# Altium PCB BUNE.PcbDoc (part 1 of 2)
Units mm, origin at the board's own origin, x right, y up, seen from the top; angles counter-clockwise.
Board outline 148 x 105 mm, 2 copper layers (Top Layer, Bottom Layer); 139 components, 96 nets, 476 pads, 94 vias.
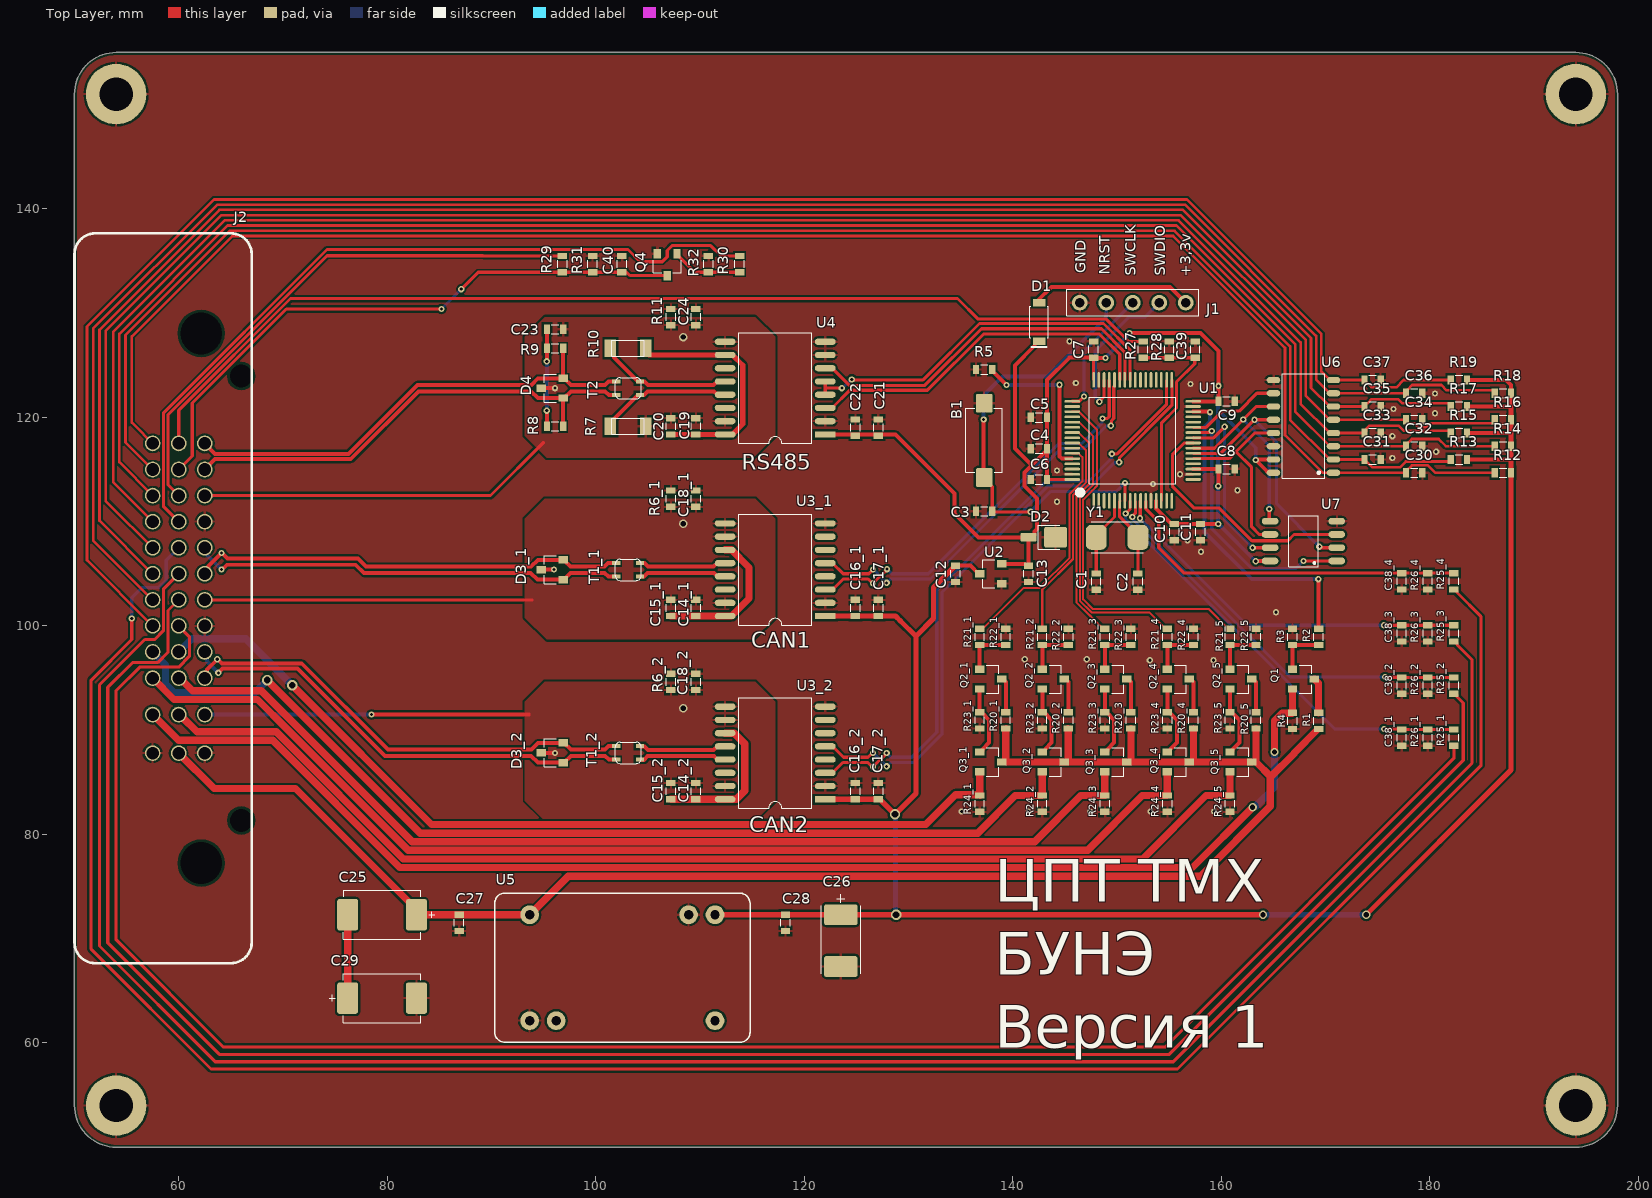
[diagram p0: Top Layer view]
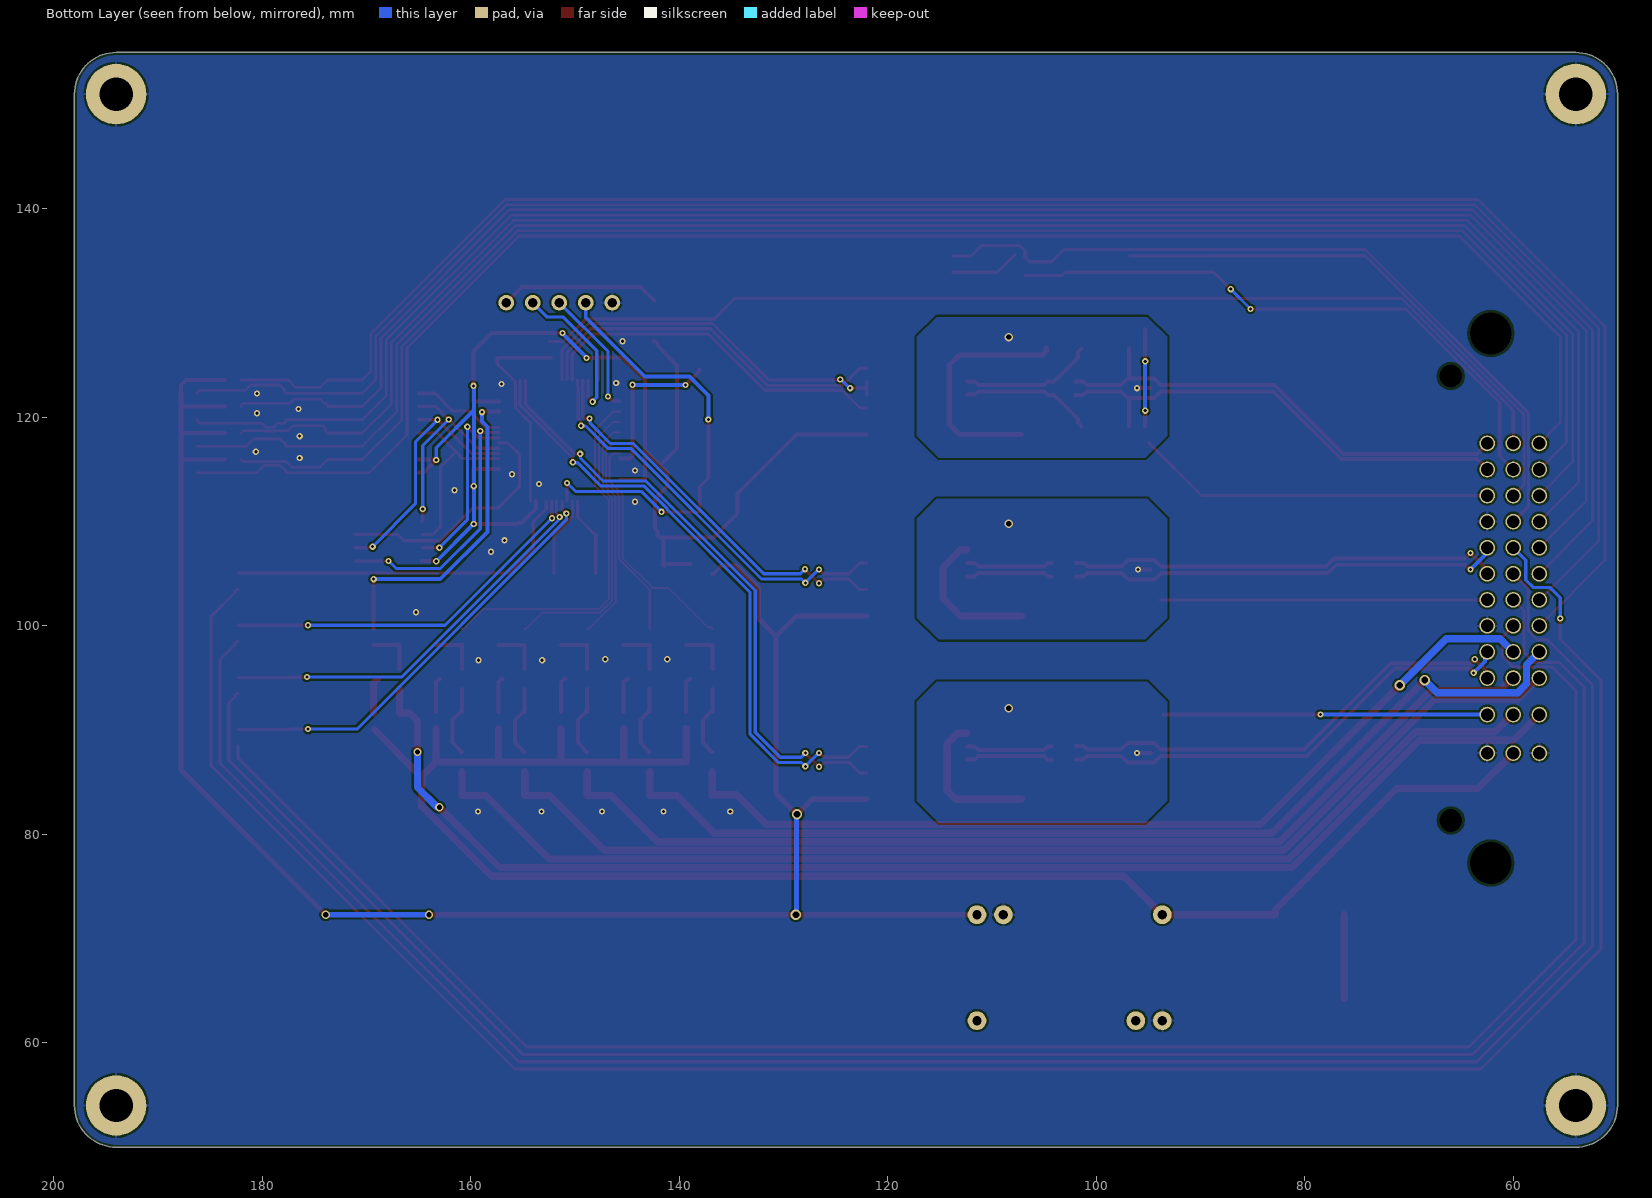
[diagram p1: Bottom Layer view, seen from below]
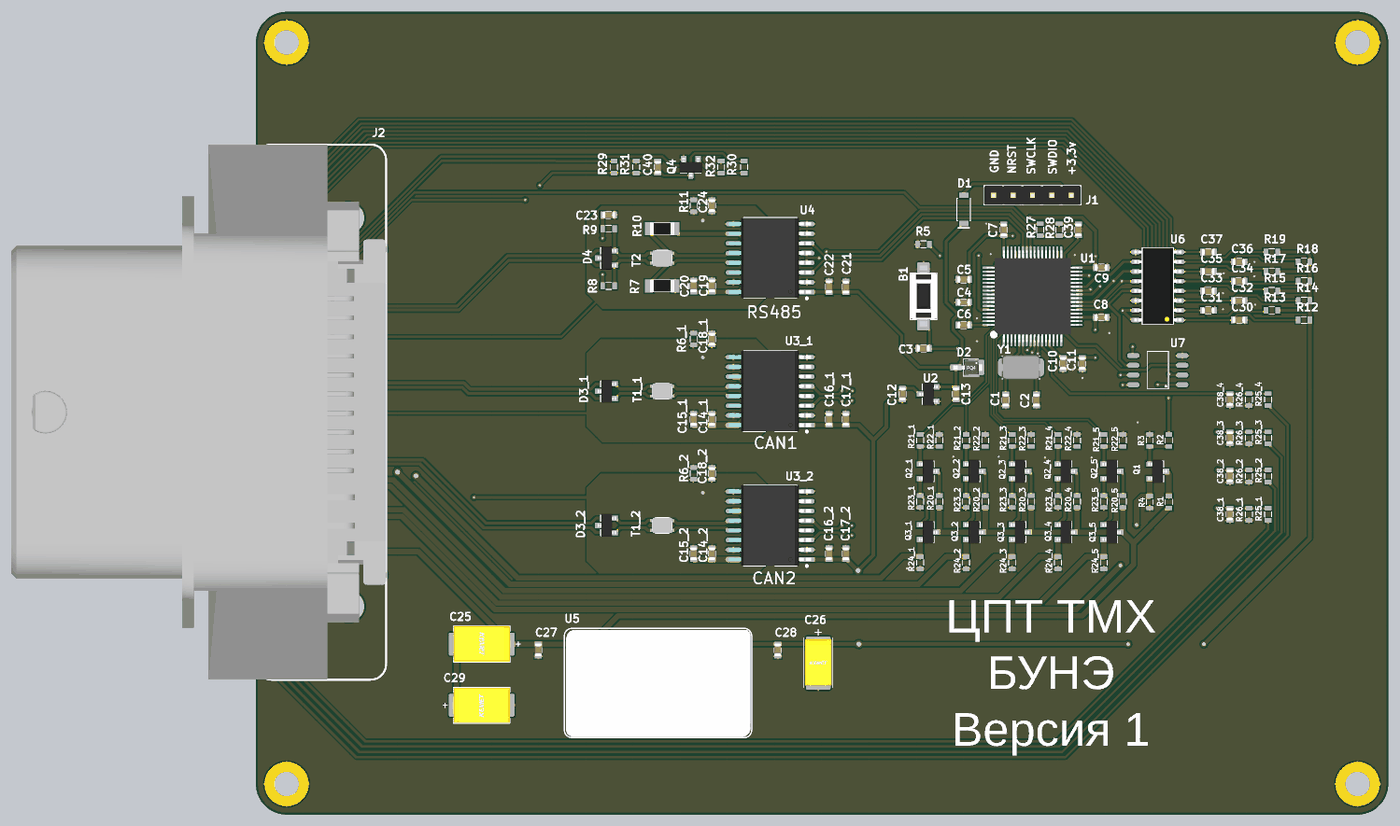
[diagram p3: 3D render of the assembled board from above, using the file's embedded part models]

## Layer stack, top to bottom
Top Solder: solder mask 0.0102, Solder Resist, Dk 3.5
Top Layer: signal copper 0.0356
Dielectric 1: dielectric 0.32, FR-4, Dk 4.8
Bottom Layer: signal copper 0.0356
Bottom Solder: solder mask 0.0102, Solder Resist, Dk 3.5

## Board outline
50,54 50,151 cw(c54,151) 54,155 194,155 cw(c194,151) 198,151 198,54 cw(c194,54) 194,50 54,50 cw(c54,54)

## Design rules (kind name [scope] priority, off if disabled: settings)
AcuteAngle [All] p1: minimum=3.50000000000000E+0001 checktracksonly=FALSE
BoardOutlineClearance "BoardOutlineClearance 1" [All] p1: gap=0.25 ignorepadtopadclearanceinfootprint=FALSE except(0: Arc-SplitContinuation Track-SplitContinuation SMDPad-SplitContinuation THPad-SplitContinuation Via-SplitContinuation Fill-SplitContinuation Poly-SplitContinuation Region-SplitContinuation Text-SplitContinuation) // Milling
Clearance "Clearance-1 1/2 Oz" [All] p1: gap=0.125 ignorepadtopadclearanceinfootprint=FALSE except(0.2: Arc-Fill Arc-Poly Track-Fill Track-Poly SMDPad-SMDPad SMDPad-Fill SMDPad-Poly THPad-Fill THPad-Poly Via-Fill Via-Poly Fill-Fill Fill-Poly Poly-Poly Poly-Region Poly-Text; 0.25: Arc-Hole Track-Hole SMDPad-Hole THPad-Hole Via-Hole Fill-Hole Poly-Hole Region-Hole Text-Hole) // Standart
ComponentClearance [All] p1: gap=0.1 collisioncheckmode=3 verticalgap=0.1 showdistances=FALSE
DiffPairsRouting "DiffPairsRouting 1/2 Oz" [All] p1: maxlimit=0.254 minlimit=0.125 mostfreqgap=0.254 toplayer_minwidth=0.125 toplayer_maxwidth=0.381 toplayer_prefwidth=0.381 bottomlayer_minwidth=0.125 bottomlayer_maxwidth=0.381 bottomlayer_prefwidth=0.381 maxuncoupledlength=12.7
Height [All] p1 off: minheight=0 maxheight=25.4 prefheight=12.7
HoleSize "Minimum HoleSize" [IsPad] p1: absolutevalues=TRUE maxlimit=5.9 minlimit=0.6 maxpercent=80.000 minpercent=20.000
HoleSize "Minimum HoleSize VIA 1" [IsVia] p2: absolutevalues=TRUE maxlimit=5.9 minlimit=0.3 maxpercent=80.000 minpercent=20.000 // Standart
HoleToHoleClearance Hole2HoleClearance [All] p1: gap=0.25 allowstackedmicrovias=FALSE
MinimumAnnularRing "Minimum AR VIA Standart" [All] p1: minimumring=0.15
MinimumAnnularRing "Minimum AR PAD Standart" [All] p2: minimumring=0.2
MinimumSolderMaskSliver "SolderMask Bridge Standart" [All] p1: minsoldermaskwidth=0.15 // All Masks
PlaneClearance "PlaneClearance-1 1/2 Oz" [All] p1: clearance=0.2 // Standart
PlaneConnect "TermalConnect-1 1/2 Oz" [All] p1: planeconnectstyle=Relief reliefexpansion=0.2 reliefentries=4 reliefconductorwidth=0.2 reliefairgap=0.2 // Standart
PolygonConnect "PolygonConnect-1 1/2 Oz" [All] p1: thpad.connectstyle=Relief thpad.reliefconductorwidth=0.254 thpad.reliefentries=4 thpad.polygonreliefangle="90 Angle" thpad.airgapwidth=0.2 smdpad.connectstyle=Relief smdpad.reliefconductorwidth=0.254 smdpad.reliefentries=4 smdpad.polygonreliefangle="90 Angle" smdpad.airgapwidth=0.2 via.connectstyle=Direct via.reliefconductorwidth=0.254 via.reliefentries=4 via.polygonreliefangle="90 Angle" via.airgapwidth=0.254 // Standart
RoutingCorners [All] p1 off: cornerstyle=45-Degree minsetback=2.54 maxsetback=2.54
RoutingVias [All] p1: holewidth=0.4 width=0.8 viastyle="Through Hole" minholewidth=0.3 minwidth=0.6 maxholewidth=5.9 maxwidth=8.9
SilkToSilkClearance Silk2SilkClearance [All] p1 off: silktosilkclearance=0.15
SilkToSolderMaskClearance Silk2SolderMaskClearance [IsPad] p1 off: minsilkscreentomaskgap=0.15 clearancetoexposedcopper=TRUE
SolderMaskExpansion SolderMaskExpansion-1 [All] p1: expansion=0.05 istentingtop=FALSE // Standart
UnRoutedNet [All] p1: checkbadconnections=TRUE
Width "Width 1/2 Oz" [All] p1: maxlimit=10 minlimit=0.125 preferedwidth=0.254 checkconnectedcopper=TRUE
18 further rules are at their usual default settings.

## Classes and differential pairs
net class CAN_L[1..2]: CAN_L1 CAN_L2
net class CAN_H[1..2]: CAN_H1 CAN_H2
channel class DigitalInput: DI1 DI2 DI3 DI4 DI5
net class DI24[1..4]: DI241 DI242 DI243 DI244
net class DI3.3[1..4]: DI3.31 DI3.32 DI3.33 DI3.34
component class DI4: C38_4 R25_4 R26_4
component class DI3: C38_3 R25_3 R26_3
component class DI2: C38_2 R25_2 R26_2
component class DI1: C38_1 R25_1 R26_1
channel class DigitalOut: DO1 DO2 DO3 DO4 DO5
channel class CAN: CAN1 CAN2
net class GND_CAN[1..2]: GND_CAN1 GND_CAN2
net class Gate[1..5]: Gate1 Gate2 Gate3 Gate4 Gate5
net class DO[1..5]: DO1 DO2 DO3 DO4 DO5
net class CAN_TX[1..2]: CAN_TX1 CAN_TX2
net class CAN_RX[1..2]: CAN_RX1 CAN_RX2
component class Flash: U7
component class DO5: Q2_5 Q3_5 R20_5 R21_5 R22_5 R23_5 R24_5
component class DO4: Q2_4 Q3_4 R20_4 R21_4 R22_4 R23_4 R24_4
component class DO3: Q2_3 Q3_3 R20_3 R21_3 R22_3 R23_3 R24_3
component class DO2: Q2_2 Q3_2 R20_2 R21_2 R22_2 R23_2 R24_2
component class DO1: Q2_1 Q3_1 R20_1 R21_1 R22_1 R23_1 R24_1
component class CAN2: C14_2 C15_2 C16_2 C17_2 C18_2 D3_2 R6_2 T1_2 U3_2
component class CAN1: C14_1 C15_1 C16_1 C17_1 C18_1 D3_1 R6_1 T1_1 U3_1
component class BUS1: C19 C20 C21 C22 C23 C24 D4 R7 R8 R9 R10 R11 T2 U4
component class ADC: C30 C31 C32 C33 C34 C35 C36 C37 R12 R13 R14 R15 R16 R17 R18 R19 U6
net class TEMP[1..8]: TEMP1 TEMP2 TEMP3 TEMP4 TEMP5 TEMP6 TEMP7 TEMP8
component class Main: C25 C26 C27 C28 C29 C40 J2 Q4 R29 R30 R31 R32 U5
component class MCU: B1 C1 C2 C3 C4 C5 C6 C7 C8 C9 C10 C11 C12 C13 C39 D1 D2 J1 Q1 R1 R2 R3 R4 R5 R27 R28 U1 U2 Y1

## Components (designator, comment, footprint, x,y, rotation, side; value= is the part's Value field where it differs from the comment)
B1 "But" "BUTTON 6x3.5" 137.25,121.355 r0 top
C1 "10pF" "0603 Capicator" 148,104.25 r270 top
C2 "10pF" "0603 Capicator" 152,104.25 r270 top
C3 "0.1uF" "0603 Capicator" 137.25,110.993 r180 top
C4 "4.7uF" "0603 Capicator" 142.5,117 r0 top
C5 "0.1uF" "0603 Capicator" 142.5,120 r0 top
C6 "0.1uF" "0603 Capicator" 142.5,114.043 r0 top
C7 "0.1uF" "0603 Capicator" 147.75,126.5 r270 top
C8 "0.1uF" "0603 Capicator" 160.5,115.043 r180 top
C9 "0.1uF" "0603 Capicator" 160.5,121.543 r180 top
C10 "10nF" "0603 Capicator" 155.5,109 r90 top
C11 "1uF" "0603 Capicator" 158,109 r90 top
C12 "1uF" "0603 Capicator" 134.5,105 r90 top
C13 "1uF" "0603 Capicator" 141.5,105 r90 top
C14_1 "0.1uF" "0603 Capicator" 109.6,101.72 r270 top (schematic designator C14)
C14_2 "0.1uF" "0603 Capicator" 109.6,84.145 r270 top (schematic designator C14)
C15_1 "10uF" "0603 Capicator" 107.2,101.72 r270 top (schematic designator C15)
C15_2 "10uF" "0603 Capicator" 107.2,84.145 r270 top (schematic designator C15)
C16_1 "0.1uF" "0603 Capicator" 124.9,101.72 r270 top (schematic designator C16)
C16_2 "0.1uF" "0603 Capicator" 124.9,84.145 r270 top (schematic designator C16)
C17_1 "10uF" "0603 Capicator" 127.1,101.72 r270 top (schematic designator C17)
C17_2 "10uF" "0603 Capicator" 127.1,84.145 r270 top (schematic designator C17)
C18_1 "1nF" "0603 Capicator" 109.6,112.2 r270 top (schematic designator C18)
C18_2 "1nF" "0603 Capicator" 109.6,94.625 r270 top (schematic designator C18)
C19 "0.1uF" "0603 Capicator" 109.6,119.145 r90 top
C20 "10uF" "0603 Capicator" 107.2,119.145 r90 top
C21 "10uF" "0603 Capicator" 127.1,119.025 r270 top
C22 "0.1uF" "0603 Capicator" 124.9,119.025 r90 top
C23 "4.7uF" "0603 Capicator" 96.095,128.45 r0 top
C24 "1nF" "0603 Capicator" 109.6,129.625 r90 top
C25 "150uF" TANTAL_D_CASE 79.5,72.3 r0 top
C26 "10uF" TANTAL_C_CASE 123.5,71.1 r90 top
C27 "2.2uF" "0603 Capicator" 86.9,71.52 r90 top
C28 "10uF" "0603 Capicator" 118.2,71.52 r90 top
C29 "150uF" TANTAL_D_CASE 79.5,64.3 r180 top
C30 "4.7uF" "0603 Capicator" 178.5,114.69 r180 top
C31 "4.7uF" "0603 Capicator" 174.5,115.96 r180 top
C32 "4.7uF" "0603 Capicator" 178.5,117.23 r180 top
C33 "4.7uF" "0603 Capicator" 174.5,118.5 r180 top
C34 "4.7uF" "0603 Capicator" 178.5,119.77 r180 top
C35 "4.7uF" "0603 Capicator" 174.5,121.04 r180 top
C36 "4.7uF" "0603 Capicator" 178.5,122.31 r180 top
C37 "4.7uF" "0603 Capicator" 174.5,123.58 r180 top
C38_1 "4.7uF" "0603 Capicator" 177.3,89.28 r90 top (schematic designator C38)
C38_2 "4.7uF" "0603 Capicator" 177.3,94.28 r90 top (schematic designator C38)
C38_3 "4.7uF" "0603 Capicator" 177.3,99.28 r90 top (schematic designator C38)
C38_4 "4.7uF" "0603 Capicator" 177.3,104.28 r90 top (schematic designator C38)
C39 "4.7uF" "0603 Capicator" 157.5,126.5 r270 top
C40 "10uF" "0603 Capicator" 102.5,134.7 r270 top
D1 "Diode" sod-123 142.513,131 r270 top
D2 "TVS 3.3V" DO-216AA 143,108.5 r180 top
D3_1 "TVS" SOT-23 96.875,104.435 r90 top (schematic designator D3)
D3_2 "TVS" SOT-23 96.875,86.881 r90 top (schematic designator D3)
D4 "TVS" SOT-23 96.875,121.85 r90 top
J1 "PLS 5x1" "PLS 5x1" 146.42,131 r0 top
J2 "Conn 36" Molex_477320361 65,117.5 r270 top
Q1 "MOSFET-N" SOT-23 166.825,95.848 r270 top
Q2_1 "MOSFET-N" SOT-23 136.825,95.848 r270 top (schematic designator Q2)
Q2_2 "MOSFET-N" SOT-23 142.825,95.848 r270 top (schematic designator Q2)
Q2_3 "MOSFET-N" SOT-23 148.825,95.848 r270 top (schematic designator Q2)
Q2_4 "MOSFET-N" SOT-23 154.825,95.848 r270 top (schematic designator Q2)
Q2_5 "MOSFET-N" SOT-23 160.825,95.848 r270 top (schematic designator Q2)
Q3_1 "MOSFET-N" SOT-23 136.825,87.898 r270 top (schematic designator Q3)
Q3_2 "MOSFET-N" SOT-23 142.825,87.898 r270 top (schematic designator Q3)
Q3_3 "MOSFET-N" SOT-23 148.825,87.898 r270 top (schematic designator Q3)
Q3_4 "MOSFET-N" SOT-23 154.825,87.898 r270 top (schematic designator Q3)
Q3_5 "MOSFET-N" SOT-23 160.825,87.898 r270 top (schematic designator Q3)
Q4 "MOSFET-N" SOT-23 107.8,135.7 r180 top
R1 "1k" "0603 Resistor" 169.325,90.888 r270 top
R2 "160R" "0603 Resistor" 169.325,98.948 r270 top
R3 "2.4k" "0603 Resistor" 166.825,98.948 r270 top
R4 "3.9k" "0603 Resistor" 166.825,90.888 r90 top
R5 "3.9k" "0603 Resistor" 137.25,124.593 r180 top
R6_1 "1M" "0603 Resistor" 107.2,112.2 r270 top (schematic designator R6)
R6_2 "1M" "0603 Resistor" 107.2,94.625 r270 top (schematic designator R6)
R7 "390R" "1206 RESISTOR" 103.1,119.145 r0 top
R8 "62R" "0603 Resistor" 96.095,119.145 r0 top
R9 "62R" "0603 Resistor" 96.095,126.625 r180 top
R10 "390R" "1206 RESISTOR" 103.1,126.625 r180 top
R11 "1M" "0603 Resistor" 107.2,129.625 r90 top
R12 "300R" "0603 Resistor" 187,114.69 r0 top
R13 "300R" "0603 Resistor" 182.78,115.96 r0 top
R14 "300R" "0603 Resistor" 187,117.23 r0 top
R15 "300R" "0603 Resistor" 182.78,118.5 r0 top
R16 "300R" "0603 Resistor" 187,119.77 r0 top
R17 "300R" "0603 Resistor" 182.78,121.04 r0 top
R18 "300R" "0603 Resistor" 187,122.31 r0 top
R19 "300R" "0603 Resistor" 182.78,123.58 r0 top
R20_1 "1k" "0603 Resistor" 139.325,90.948 r270 top (schematic designator R20)
R20_2 "1k" "0603 Resistor" 145.325,90.948 r270 top (schematic designator R20)
R20_3 "1k" "0603 Resistor" 151.325,90.948 r270 top (schematic designator R20)
R20_4 "1k" "0603 Resistor" 157.325,90.948 r270 top (schematic designator R20)
R20_5 "1k" "0603 Resistor" 163.325,90.948 r270 top (schematic designator R20)
R21_1 "160R" "0603 Resistor" 136.825,98.948 r270 top (schematic designator R21)
R21_2 "160R" "0603 Resistor" 142.825,98.948 r270 top (schematic designator R21)
R21_3 "160R" "0603 Resistor" 148.825,98.948 r270 top (schematic designator R21)
R21_4 "160R" "0603 Resistor" 154.825,98.948 r270 top (schematic designator R21)
R21_5 "160R" "0603 Resistor" 160.825,98.948 r270 top (schematic designator R21)
R22_1 "2.4k" "0603 Resistor" 139.325,98.948 r270 top (schematic designator R22)
R22_2 "2.4k" "0603 Resistor" 145.325,98.948 r270 top (schematic designator R22)
R22_3 "2.4k" "0603 Resistor" 151.325,98.948 r270 top (schematic designator R22)
R22_4 "2.4k" "0603 Resistor" 157.325,98.948 r270 top (schematic designator R22)
R22_5 "2.4k" "0603 Resistor" 163.325,98.948 r270 top (schematic designator R22)
R23_1 "3.9k" "0603 Resistor" 136.825,90.948 r90 top (schematic designator R23)
R23_2 "3.9k" "0603 Resistor" 142.825,90.948 r90 top (schematic designator R23)
R23_3 "3.9k" "0603 Resistor" 148.825,90.948 r90 top (schematic designator R23)
R23_4 "3.9k" "0603 Resistor" 154.825,90.948 r90 top (schematic designator R23)
R23_5 "3.9k" "0603 Resistor" 160.825,90.948 r90 top (schematic designator R23)
R24_1 "1k" "0603 Resistor" 136.825,82.948 r90 top (schematic designator R24)
R24_2 "1k" "0603 Resistor" 142.825,82.948 r90 top (schematic designator R24)
R24_3 "1k" "0603 Resistor" 148.825,82.948 r90 top (schematic designator R24)
R24_4 "1k" "0603 Resistor" 154.825,82.948 r90 top (schematic designator R24)
R24_5 "1k" "0603 Resistor" 160.825,82.948 r90 top (schematic designator R24)
R25_1 "6.8k" "0603 Resistor" 182.3,89.28 r270 top (schematic designator R25)
R25_2 "6.8k" "0603 Resistor" 182.3,94.28 r270 top (schematic designator R25)
R25_3 "6.8k" "0603 Resistor" 182.3,99.28 r270 top (schematic designator R25)
R25_4 "6.8k" "0603 Resistor" 182.3,104.28 r270 top (schematic designator R25)
R26_1 "1k" "0603 Resistor" 179.8,89.28 r90 top (schematic designator R26)
R26_2 "1k" "0603 Resistor" 179.8,94.28 r90 top (schematic designator R26)
R26_3 "1k" "0603 Resistor" 179.8,99.28 r90 top (schematic designator R26)
R26_4 "1k" "0603 Resistor" 179.8,104.28 r90 top (schematic designator R26)
R27 "6.8k" "0603 Resistor" 152.5,126.5 r90 top
R28 "1k" "0603 Resistor" 155,126.5 r270 top
R29 "560k" "0603 Resistor" 96.8,134.7 r90 top
R30 "560k" "0603 Resistor" 113.8,134.7 r90 top
R31 "100k" "0603 Resistor" 99.7,134.7 r270 top
R32 "100k" "0603 Resistor" 110.8,134.7 r270 top
T1_1 "ACM2520" ACM2520 104.25,104.725 r180 top (schematic designator T1)
T1_2 "ACM2520" ACM2520 104.25,87.172 r180 top (schematic designator T1)
T2 "ACM2520" ACM2520 104.25,122.14 r180 top
U1 "STM32F105RCT6" LQFP64 151.5,117.793 r90 top
U2 "LDO 3V" SOT-23 138.925,104.05 r90 top
U3_1 "CAN Tranciever" SOIC16W 117.2,105.3 r180 top (schematic designator U3)
U3_2 "CAN Tranciever" SOIC16W 117.2,87.725 r180 top (schematic designator U3)
U4 "RS-485" SOIC16W 117.2,122.725 r180 top
U5 "DC/DC 24/5" VDRI10(6) 93.66,62.14 r0 top
U6 "ADC 8-channel" SOIC-16 170.75,114.69 r90 top
U7 "Flash" SOIC-8-0 171.075,106.23 r180 top
Y1 "8MHz" NX5032GA 150,108.5 r180 top

## Footprints (in the part's own frame and the unit in brackets; to place one, negate y for a bottom-side part, rotate by r counter-clockwise, add the part's x,y. Pads: shape width x height; smd on the part's side, far side on the other; paste and mask are expansions set on the pad)
"0603 Capicator" [mm]
  rect 0.6x0.9 smd: 1(-0.78,0) 2(0.78,0)
  silkscreen extent -0.35,-0.45 0.35,0.45, body extent -0.82,-0.45 0.88,0.45, height 0.9
"0603 Resistor" [mm]
  rect 0.6x0.9 smd: 1(-0.78,0) 2(0.78,0)
  silkscreen extent -0.35,-0.45 0.35,0.45, body extent -0.85,-0.45 0.85,0.45, height 0.55
"1206 RESISTOR" [mm] "smd"
  rect 1.1x1.7 smd: 1(-1.7,0) 2(1.7,0)
  silkscreen extent -1.55,-0.77 1.55,0.77, body extent -1.55,-0.77 1.55,0.78, height 0.55
ACM2520 [mm]
  rect 0.8x0.4 smd: 1(0,0) 2(2.3,0) 3(0,-1.3) 4(2.3,-1.3)
  silkscreen extent -0.13,-1.68 2.4,0.38, body extent -0.11,-1.64 2.39,0.36, height 1.24
"BUTTON 6x3.5" [mm]
  rrect20% 1.6x1.8 smd: 1(0,0) 2(0,-7.125)
  silkscreen extent -1.75,-6.63 1.75,-0.48, body extent -1.75,-7.52 1.75,0.48, height 4.3
DO-216AA [mm]
  rrect20% 2.2x2 smd: 1(-1.1,0)
  rrect20% 1.5x0.8 smd: 2(1.5,0)
  silkscreen extent -1.5,-1.15 0.58,1.15, body extent -1.91,-0.93 1.85,0.98, height 1.02
LQFP64 [mm]
  oval 1.5x0.254 smd paste+0 mask+0.02: 1(-5.8,3.75) 2(-5.8,3.25) 3(-5.8,2.75) 4(-5.8,2.25) 5(-5.8,1.75) 6(-5.8,1.25) 7(-5.8,0.75) 8(-5.8,0.25) 9(-5.8,-0.25) 10(-5.8,-0.75) 11(-5.8,-1.25) 12(-5.8,-1.75) 13(-5.8,-2.25) 14(-5.8,-2.75) 15(-5.8,-3.25) 16(-5.8,-3.75) 33(5.8,-3.75) 34(5.8,-3.25) 35(5.8,-2.75) 36(5.8,-2.25) 37(5.8,-1.75) 38(5.8,-1.25) 39(5.8,-0.75) 40(5.8,-0.25) 41(5.8,0.25) 42(5.8,0.75) 43(5.8,1.25) 44(5.8,1.75) 45(5.8,2.25) 46(5.8,2.75) 47(5.8,3.25) 48(5.8,3.75)
  oval 0.254x1.5 smd paste+0 mask+0.02: 17(-3.75,-5.8) 18(-3.25,-5.8) 19(-2.75,-5.8) 20(-2.25,-5.8) 21(-1.75,-5.8) 22(-1.25,-5.8) 23(-0.75,-5.8) 24(-0.25,-5.8) 25(0.25,-5.8) 26(0.75,-5.8) 27(1.25,-5.8) 28(1.75,-5.8) 29(2.25,-5.8) 30(2.75,-5.8) 31(3.25,-5.8) 32(3.75,-5.8) 49(3.75,5.8) 50(3.25,5.8) 51(2.75,5.8) 52(2.25,5.8) 53(1.75,5.8) 54(1.25,5.8) 55(0.75,5.8) 56(0.25,5.8) 57(-0.25,5.8) 58(-0.75,5.8) 59(-1.25,5.8) 60(-1.75,5.8) 61(-2.25,5.8) 62(-2.75,5.8) 63(-3.25,5.8) 64(-3.75,5.8)
  silkscreen extent -5.2,-4.15 4.15,5.25, body extent -6,-6.02 6,5.98, height 1.56
Molex_477320361 [mm] "Molex PCB Header 48 pin"
  round 1.5 hole 1.2: 2A(0,-2.5) 2B(2.5,-2.5) 2C(5,-2.5) 2D(7.5,-2.5) 2E(10,-2.5) 2F(12.5,-2.5) 2G(15,-2.5) 2H(17.5,-2.5) 2J(20,-2.5) 2K(22.5,-2.5) 2L(26,-2.5) 2M(29.7,-2.5) 3A(0,-5) 3B(2.5,-5) 3C(5,-5) 3D(7.5,-5) 3E(10,-5) 3F(12.5,-5) 3G(15,-5) 3H(17.5,-5) 3J(20,-5) 3K(22.5,-5) 3L(26,-5) 3M(29.7,-5) 4A(0,-7.5) 4B(2.5,-7.5) 4C(5,-7.5) 4D(7.5,-7.5) 4E(10,-7.5) 4F(12.5,-7.5) 4G(15,-7.5) 4H(17.5,-7.5) 4J(20,-7.5) 4K(22.5,-7.5) 4L(26,-7.5) 4M(29.7,-7.5)
  round 1.524 hole 4: 4(-10.55,-2.85) 7(40.25,-2.85)
  round 1.524 hole 2.2: 5(-6.45,1) 6(36.15,1)
  silkscreen extent -20.15,-15 49.85,2, body extent -20.1,-47 49.81,2, height 27.6
NX5032GA [mm] "Crystal"
  rrect50% 2x2.4 smd: 1(-2,0) 2(2,0)
  silkscreen extent -2.5,-1.5 2.5,1.5, body extent -2.5,-1.6 2.5,1.6, height 1.5
"PLS 5x1" [mm] "Connector; Header; 5 Position"
  round 1.5 hole 0.9: 1(0,0) 2(2.54,0) 3(5.08,0) 4(7.62,0) 5(10.16,0)
  silkscreen extent -1.27,-1.27 11.43,1.27, body extent -1.28,-1.28 11.42,1.26, height 8.54
sod-123 [mm]
  rect 0.7x1.2 smd: 1(0,0) 2(3.7,0)
  silkscreen extent 0.35,-0.9 4.25,0.87, body extent 0,-0.8 3.7,0.8
SOIC16W [mm]
  rect 2x0.6 smd: 1(-4.81,4.36)
  oval 2x0.6 smd: 2(-4.81,3.09) 3(-4.81,1.82) 4(-4.81,0.55) 5(-4.81,-0.72) 6(-4.81,-1.99) 7(-4.81,-3.26) 8(-4.81,-4.53) 9(4.79,-4.53) 10(4.79,-3.26) 11(4.79,-1.99) 12(4.79,-0.72) 13(4.79,0.55) 14(4.79,1.82) 15(4.79,3.09) 16(4.79,4.36)
  round 0.5 on Top Overlay mask+0.051: ""(-4.8,5.2)
  silkscreen extent -3.5,-5.39 3.48,5.21, body extent -5.35,-5.35 5.35,5.15, height 2.65
SOIC-8-0 [mm]
  oval 1.6x0.65 smd: 1(0,0) 2(0,-1.27) 3(0,-2.54) 4(0,-3.81) 5(6.4,-3.81) 6(6.4,-2.54) 7(6.4,-1.27) 8(6.4,0)
  silkscreen extent 1.8,-4.35 4.6,0.55, body extent 0.34,-4.35 6.11,0.55, height 1.45
SOIC-16 [mm]
  oval 0.6x1.3 smd paste+0 mask+0.1: 1(0,0) 2(1.27,0) 3(2.54,0) 4(3.81,0) 5(5.08,0) 6(6.35,0) 7(7.62,0) 8(8.89,0) 9(8.89,5.75) 10(7.62,5.75) 11(6.35,5.75) 12(5.08,5.75) 13(3.81,5.75) 14(2.54,5.75) 15(1.27,5.75) 16(0,5.75)
  silkscreen extent -0.55,0.82 9.48,4.92, body extent -0.53,-0.19 9.44,5.94, height 1.78
SOT-23 [mm]
  rect 0.7x0.9 smd: 1(0,0) 2(1.9,0) 3(0.95,2.1)
  silkscreen extent -0.4,0.65 2.3,1.83, body extent -0.55,-0.17 2.45,2.23, height 1.1
TANTAL_C_CASE [mm]
  rrect20% 2x3.2 smd: 1(-3.775,0) 2(1.2,0)
  silkscreen extent -4.45,-1.9 3.15,1.88, body extent -4.35,-1.75 1.95,1.75, height 2.81
TANTAL_D_CASE [mm]
  rrect20% 2x3 smd: 1(-3.3,0) 2(3.3,0)
  silkscreen extent -3.7,-2.35 5.05,2.36, body extent -3.8,-2.28 3.8,2.32, height 3.11
VDRI10(6) [mm]
  round 1.8 hole 0.9: 1(0,0) 2(2.54,0) 8(17.78,0) 9(17.78,10.16) 10(15.24,10.16) 16(0,10.16)
  silkscreen extent -3.36,-2.07 21.14,12.23, body extent -3.12,-1.97 20.98,12.03, height 8.6

## Part data
B1: library part "Button 2 Conn", "Button 2 Conn SMD", Manufacturer="KLS electronic co ltd", Part Number=L-KLS7-TS3608-5.0-180, ComponentLink1Description=Chip&Dip, ComponentLink1URL=https://www.chipdip.ru/product/kls7-ts3608-5.0-180-td-02xa, Type=Button
C1 C2: library part "Cap 10pF (0603)", "10pF NP0 50V 5% 0603", Manufacturer="Murata Manufacturing", Part Number=GRM1885C1H100JA01D, ComponentLink1Description=Chip&Dip, ComponentLink1URL=https://www.chipdip.ru/product/grm1885c1h100j, Type=Capacitor
C3 C5 C6 C7 C8 C9 C14_1 C14_2 C16_1 C16_2 C19 C22: library part "Cap 0.1uF (0603)", "0.1uF X7R 16V 10% 0603", Manufacturer="Murata Manufacturing", Part Number=GRM188R71C104KA01D, ComponentLink1Description=Chip&Dip, ComponentLink1URL=https://www.chipdip.ru/product/grm188r71c104ka01d, Type=Capacitor
C4 C23 C30 C31 C32 C33 C34 C35 C36 C37 C38_1 C38_2 C38_3 C38_4 C39: library part "Cap 4.7uF (0603)", "4.7uF X5R 25V 10% 0603", Manufacturer="Murata Manufacturing", Part Number=GRM188R61E475KE11D, ComponentLink1Description=Chip&Dip, ComponentLink1URL=https://www.chipdip.ru/product0/9000348448, Type=Capacitor
C10: library part "Cap 10nF (0603)", "10nF X7R  100V 10% 0603", Manufacturer="Murata Manufacturing", Part Number=GRM188R72A103KA01D, ComponentLink1Description=Chip&Dip, ComponentLink1URL=https://www.chipdip.ru/product/grm188r72a103ka01d, Type=Capacitor
C11 C12 C13: library part "Cap 1uF (0603)", "1uF X5R 25V 10% 0603", Manufacturer="Murata Manufacturing", Part Number=GRM188R61E105KAADD, ComponentLink1Description=Chip&Dip, ComponentLink1URL=https://www.chipdip.ru/product/grm188r61e105k, Type=Capacitor
C15_1 C15_2 C17_1 C17_2 C20 C21 C28 C40: library part "Cap 10uF (0603)", "10uF X5R 25V 20% 0603", Manufacturer="Murata Manufacturing", Part Number=GRM188R61E106M, ComponentLink1Description=Chip&Dip, ComponentLink1URL=https://www.chipdip.ru/product/grm188r61e106m, Type=Capacitor
C18_1 C18_2 C24: library part "Cap 1nF (0603)", "X7R 1nF 100V 10% 0603", Manufacturer="Murata Manufacturing", Part Number=GRM188R72A102KA01D, ComponentLink1Description=Chip&Dip, ComponentLink1URL=https://www.chipdip.ru/product/grm188r72a102ka01d, Type=Capacitor
C25 C29: library part "Cap Tantal 150uF (SMDD)", "TECAP, 150uF, 16V, case D, 10%", Manufacturer=Vishay, Part Number=293D157X9010D2TE3, ComponentLink1Description=Chip&Dip, ComponentLink1URL=https://www.chipdip.ru/product0/8018239339, Type=Capacitor
C26: library part "Cap Tantal 10uF (SMDC)", "TECAP, 10uF, 35V, case C, 10%", Manufacturer=China, Part Number=TECAP10/35VC10, ComponentLink1Description=Chip&Dip, ComponentLink1URL=https://www.chipdip.ru/product/tecap-10-mkf-35-v-tip-c-10, Type=Capacitor
C27: library part "Cap 2.2uF (0603)", "2.2uF X5R 50V 10% 0603", Manufacturer="Murata Manufacturing", Part Number=GRM188R61H225KE11D, ComponentLink1Description=Chip&Dip, ComponentLink1URL=https://www.chipdip.ru/product/grm188r61h225ke11d-murata, Type=Capacitor
D1: library part "Diode Schottky (SOD-123)", "0.5 A, Low Forward Voltage less than 385 mV, 400 mW Power Dissipation Package", Manufacturer="ON Semiconductor", Part Number=MBR0520L, ComponentLink1Description=DataSheet, ComponentLink1URL=http://www.farnell.com/datasheets/1875336.pdf, ComponentLink2Description=Chip&Dip, ComponentLink2URL=https://www.chipdip.ru/product/mbr0520l, Type=Diode
D2: library part "TVS Diode 3.3V [SM2T]", "High peak pulse power: 200 W (10/1000 μs)", Manufacturer=STMicroelectronics, Part Number=SM2T3V3A, ComponentLink1Description=DataSheet, ComponentLink1URL=https://www.st.com/resource/en/datasheet/sm2t3v3a.pdf, ComponentLink2Description=Chip&Dip, ComponentLink2URL=https://www.chipdip.ru/product0/8283670575, Type=Diode
D3_1 D3_2 D4: library part "TVS Diode Arrays", "The SM24CANB TVS Diode Array is designed to protect automotive Controller Area Network (CAN) lines from damage due to electrostatic discharge (ESD), electrical fast transient (EFT), and other overvoltage transients.", Manufacturer=Littelfuse, Part Number=SM24CANB-02HTG, ComponentLink1Description=DataSheet, ComponentLink1URL=https://m.littelfuse.com/~/media/electronics/datasheets/tvs_diode_arrays/littelfuse_tvs_diode_array_sm24canb_datasheet.pdf.pdf, ComponentLink2Description=Chip&Dip, ComponentLink2URL=https://www.chipdip.ru/product1/8001779022, Type=Diode
J1: library part "Conn 5 (PLS)", "Header, 5-Pin"
J2: library part "Conn 36 (Molex)", "Molec 36 pin PCB Header 477320361", Manufacturer=Molex, Part Number=477320361, ComponentLink1Description=ChipDip, ComponentLink1URL=https://www.chipdip.ru/product0/8004298252, ComponentLink2Description=Promelec, ComponentLink2URL=https://www.promelec.ru/product/427663/, ComponentLink3Description=Datasheet, ComponentLink3URL=https://static.chipdip.ru/lib/848/DOC011848025.pdf, Type=Connector
Q1 Q2_1 Q2_2 Q2_3 Q2_4 Q2_5 Q3_1 Q3_2 Q3_3 Q3_4 Q3_5 Q4: library part "MOSFET-N [IRLML]", "VDS 30V,  VGS Max ± 20V, RDS 27-40mΩ,", Manufacturer="Infineon Technologies", Part Number=IRLML0030TRPBF, ComponentLink1Description=DataSheet, ComponentLink1URL=https://static.chipdip.ru/lib/300/DOC000300382.pdf, ComponentLink2Description=Chip&Dip, ComponentLink2URL=https://www.chipdip.ru/product/irlml0030trpbf, Type=Transistor
R1 R20_1 R20_2 R20_3 R20_4 R20_5 R24_1 R24_2 R24_3 R24_4 R24_5 R26_1 R26_2 R26_3 R26_4 R28: library part "Res 1k (0603)", "0.1W 0603 1k, 1%", Manufacturer=Taiwan, Part Number=RC0603FR-071KL, ComponentLink1Description=Chip&Dip, ComponentLink1URL=https://www.chipdip.ru/product0/9000079676, Type=Resistor
R2 R21_1 R21_2 R21_3 R21_4 R21_5: library part "Res 160R (0603)", "0.1W 0603 160R, 1%", Manufacturer=Taiwan, Part Number=RC0603FR-07160RL, ComponentLink1Description=Chip&Dip, ComponentLink1URL=https://www.chipdip.ru/product/0.1w-0603-160-om-1, Type=Resistor
R3 R22_1 R22_2 R22_3 R22_4 R22_5: library part "Res 2.4k (0603)", "0.1W 0603 2.4k, 1%", Manufacturer=Taiwan, Part Number=RC0603FR-072K4L, ComponentLink1Description=Chip&Dip, ComponentLink1URL=https://www.chipdip.ru/product0/9000079721, Type=Resistor
R4 R5 R23_1 R23_2 R23_3 R23_4 R23_5: library part "Res 3.9k (0603)", "0.1W 0603 3.9k, 1%", Manufacturer=Taiwan, Part Number=RC0603FR-073K9L, ComponentLink1Description=Chip&Dip, ComponentLink1URL=https://www.chipdip.ru/product0/9000079726, Type=Resistor
R6_1 R6_2 R11: library part "Res 1M (0603)", "0.1W 0603 1M, 1%", Manufacturer=Taiwan, Part Number=RC0603FR-071ML, ComponentLink1Description=Chip&Dip, ComponentLink1URL=https://www.chipdip.ru/product0/9000079784, Type=Resistor
R7 R10: library part "Res 390R (1206)", "0.25W 1206 390R", Manufacturer=Taiwan, Part Number=RC1206JR-07390KL, ComponentLink1Description=Chip&Dip, ComponentLink1URL=https://www.chipdip.ru/product0/8023504304, Type=Resistor
R8 R9: library part "Res 62R (0603)", "0.1W 0603 62R, 1%", Manufacturer=Taiwan, Part Number=RC0603FR-0762RL, ComponentLink1Description=Chip&Dip, ComponentLink1URL=https://www.chipdip.ru/product0/9000079611, Type=Resistor
R12 R13 R14 R15 R16 R17 R18 R19: library part "Res 300R (0603)", "0.1W 0603 300R, 1%", Manufacturer=Taiwan, Part Number=RC0603FR-07360RL, ComponentLink1Description=Chip&Dip, ComponentLink1URL=https://www.chipdip.ru/product0/9000079629, Type=Resistor
R25_1 R25_2 R25_3 R25_4 R27: library part "Res 6.8k (0603)", "0.1W 0603 6.8k, 1%", Manufacturer=Taiwan, Part Number=RC0603FR-076K8L, ComponentLink1Description=Chip&Dip, ComponentLink1URL=https://www.chipdip.ru/product/0.1w-0603-6.8-kom-1, Type=Resistor
R29 R30: library part "Res 560k (0603)", "0.1W 0603 560k, 1%", Manufacturer=Taiwan, Part Number=RC0603FR-07560KL, ComponentLink1Description=Chip&Dip, ComponentLink1URL=https://www.chipdip.ru/product0/9000079778, Type=Resistor
R31 R32: library part "Res 100k (0603)", "0.1W 0603 100k, 1%", Manufacturer=Taiwan, Part Number=RC0603FR-07100KL, ComponentLink1Description=Chip&Dip, ComponentLink1URL=https://www.chipdip.ru/product0/9000079760, Type=Resistor
T1_1 T1_2 T2: "Common mode filters / Automotive signal line (for power train/safety)", Manufacturer=TDK, Part Number=ACM2520-301-2P-T002, ComponentLink1Description=DataSheet, ComponentLink1URL=https://product.tdk.com/system/files/dam/doc/product/emc/emc/cmf_cmc/catalog/cmf_commercial_signal_acm2520_en.pdf, ComponentLink2Description=ChipDip, ComponentLink2URL=https://www.chipdip.ru/product0/8008480337?ysclid=lw4t4jsj9a923851487, Type=Inductor
U1: "MCU ARM 256KB FLASH MEM 64-LQFP", Manufacturer=STMicroelectronics, ComponentLink1Description=DataSheet, ComponentLink1URL=https://static.chipdip.ru/lib/375/DOC011375072.pdf, ComponentLink2Description=Chip&Dip, ComponentLink2URL=https://www.chipdip.ru/product/stm32f105rct6, Part Number=STM32F105RCT6, Type=IC
U2: library part "LDO 3,3V [MCP]", "MCP1702 Low Dropout Voltage Regulator. The input operating range is specifiedfrom 2.7V to 13.2V", Manufacturer=Microchip, Part Number=MCP1702T-3002E/CB, ComponentLink1Description=DataSheet, ComponentLink1URL=https://static.chipdip.ru/lib/986/DOC003986671.pdf, ComponentLink2Description=Chip&Dip, ComponentLink2URL=https://www.chipdip.ru/product/mcp1702t-3002e-cb-microchip
U3_1 U3_2: library part TDA51SCANHC, "Isolated CAN Tranciever", Manufacturer="Mornsun Power", ComponentLink1Description=ChipDip, ComponentLink1URL=https://www.chipdip.ru/product0/8024219767, ComponentLink2Description=Datasheet, ComponentLink2URL=https://static.chipdip.ru/lib/623/DOC041623283.pdf, Part Number=TDA51SCANHC, Type=IC
U4: library part TDA51S485HC, "Isolated RS-485 Half-Duplex tranciever", Manufacturer=Mornsun, ComponentLink1Description=ChipDip, ComponentLink1URL=https://www.chipdip.ru/product0/8009281357, ComponentLink2Description=Datasheet, ComponentLink2URL=https://www.mornsun-power.com/html/pdf/TDA51S485HC.html, Part Number=TDA51S485HC, Type=IC
U5: library part VDRI10B05, "DC/DC converter 24/5 10W", Manufacturer=Voltbricks, ComponentLink2Description=Datasheet, ComponentLink2URL=https://support.voltbricks.ru/datasheets/VDRI10.pdf?1689593019, Part Number=VDRI10B05, Type=IC
U6: library part MCP3008-I/SL, "A/D converter with SPI serial interface", Manufacturer=Microchip, ComponentLink1Description=ChipDip, ComponentLink1URL=https://www.chipdip.ru/product/mcp3008-i-sl, ComponentLink2Description=Datadheet, ComponentLink2URL=https://static.chipdip.ru/lib/527/DOC011527685.pdf, Part Number=MCP3008-I/SL, Type=IC
U7: library part AT25DF32A-SH-T, "32MBit Flash memore 100 MHz", Manufacturer="Adesto Technologies", ComponentLink1Description=Dayasheet, ComponentLink1URL=https://static.chipdip.ru/lib/314/DOC000314047.pdf, ComponentLink2Description=ChipDip, ComponentLink2URL=https://www.chipdip.ru/product/at25df321a-sh-t?from=suggest_product, Part Number=AT25DF32A-SH-T, Type=IC
Y1: library part "Crystal 8MHz", "Crystal NX5032GA", Manufacturer="Nihon Dempa Kogio (NDK)", Part Number=NX5032GA-8MHz, ComponentLink1Description=Chip&Dip, ComponentLink1URL=https://www.chipdip.ru/product0/9000523954, Type=Crystal

## Free pads (board coordinates)
  round 5.8 hole 3.2: 0(54,54) 0(54,151) 0(194,54) 0(194,151)

## Via types
v1: diameter 0.6, hole 0.3, Top Layer to Bottom Layer, tented both sides, 83 vias
v2: diameter 0.8, hole 0.5, Top Layer to Bottom Layer, tented both sides, 7 vias
v3: diameter 1, hole 0.65, Top Layer to Bottom Layer, tented both sides, 4 vias

## Nets (pads, with @x,y where several pads share a name; then routed paths per layer and width w, separated by ;. In a path a pad name is that pad's centre, name@x,y a point inside that pad or via, vN(x,y) a via of type N, cw(c..) or ccw(c..) an arc to the next point about the centre after c; other vN are vias at no path point)
+3,3V: C4.2 C5.2 C6.2 C7.2 C8.2 C9.2 C10.2 C11.2 C13.2 C21.2 C22.1 D1.2 D2.2 U1.13 U1.19 U1.32 U1.48 U1.64 U2.2 U4.1 U6.15 U6.16 U7.8 | length 135.4
  Top Layer w0.3: C6.2@143.323,114.043 U1.64@145.7,114.043 ; U1.48@147.75,123.593 C7.2@147.75,125.72
  Top Layer w0.381: U4.1@122.01,118.365 128.735,118.365 134.4,112.7 134.4,110.8 136.7,108.5 D2.2@141.5,108.5 ; U2.2@138.925,105.95 141.18,105.95 141.35,105.78 C13.2@141.5,105.78 D2.2@141.5,108.5 ; 141.725,115.475 140.2,117 140.2,124.987 142.103,126.89 142.103,127.14 142.263,127.3 D1.2@142.513,127.3 ; C4.2@143.28,117.15 C4.2@143.28,117 C4.2@143.28,116.85 ; C4.2@143.28,117.33 C5.2@143.28,120 143.28,123.58 145.42,125.72 C7.2@147.75,125.72 147.76,125.71 148.89,125.71 v1(148.9,125.7) ; C6.2@143.323,114.043 143.28,114 C6.2@143.28,114.043 C4.2@143.28,116.85 ; v1(151.2,128.1) 158,128.1 159.737,126.363 v1(159.737,123.026) ; U1.13@153.75,111.993 153.75,111.244 154.067,110.927 154.073,110.927 155.111,109.889 155.39,109.889 C10.2@155.5,109.78 C11.2@158,109.78 158.006,109.774 159.563,109.774 v1@159.569,109.769 ; U1.19@157.3,115.043 C8.2@159.71,115.043 ; U1.32@157.3,121.543 C9.2@159.72,121.543 159.71,121.553 v1@159.71,122.99 ; v1(159.7,113.4) 159.71,113.41 C8.2@159.71,115.043 ; C8.2@159.71,115.09 C8.2@159.71,115.043 ; C8.2@159.72,115.043 C8.2@159.71,115.043 ; v1(163.3,106.2) 163.315,106.215 164.66,106.215 U7.8@164.675,106.23 ; U6.16@165,114.69 164.591,114.69 164.481,114.799 164.401,114.799 v1(163.3,115.9) 163.359,115.9 163.419,115.96 U6.15@165,115.96 ; D2.2@141.5,108.5 141.85,108.5 142.06,108.71 142.06,109.06 142.3,109.3 142.3,112.2 141.1,113.4 141.1,114.7 143.14,116.74 143.171,116.74 C4.2@143.28,116.85
  Bottom Layer w0.381: v1(148.9,125.7) 148.9,125.75 151.2,128.05 v1(151.2,128.1) ; v1@159.7,123 159.7,120.687 ; v1(163.3,106.2) 163.284,106.2 159.716,109.769 v1(159.7,109.769) v1(159.7,113.4) 159.7,120.687 ; v1(163.3,115.9) 163.3,117.087 159.7,120.687
+5V: C12.2 C16_1.2 C16_2.2 C17_1.2 C17_2.2 C26.2 C28.2 R12.2 R13.2 R14.2 R15.2 R16.2 R17.2 R18.2 R19.2 U2.3 U3_1.1 U3_2.1 U5.9 | length 191.5
  Top Layer w0.381: C12.2@134.5,105.78 135.945,105.78 136.725,105 U2.3@136.825,105 ; R13.2@183.56,115.96 187.78,115.96 ; R15.2@183.56,118.5 187.78,118.5 ; R17.2@183.56,121.04 187.78,121.04 ; R19.2@183.56,123.58 187.32,123.58 187.78,123.12 R18.2@187.78,122.31
  Top Layer w0.5: U5.9@111.44,72.3 C28.2@118.2,72.3 C26.2@123.5,72.3 v3(128.8,72.3) v2(164,72.3) ; U3_2.1@122.01,83.365 C16_2.2@124.9,83.365 C17_2.2@127.1,83.365 127.25,83.365 128.69,81.925 v3(128.7,81.925) 130.7,83.925 130.7,99 ; U3_1.1@122.01,100.94 C16_1.2@124.9,100.94 C17_1.2@127.1,100.94 128.76,100.94 129.21,100.49 130.7,99 ; C12.2@134.5,105.78 132.4,103.68 132.4,100.7 130.7,99 ; v2(173.9,72.3) 187.78,86.18 R12.2@187.78,114.69 187.78,115.96 R14.2@187.78,117.23 187.78,118.5 R16.2@187.78,119.77 187.78,121.04 R18.2@187.78,122.31
  Bottom Layer w0.5: v3(128.7,81.925) 128.75,81.875 128.75,72.35 v3(128.8,72.3) ; v2(164,72.3) v2(173.9,72.3)
+24V: C25.2 C27.2 J2.3M Q3_1.3 Q3_2.3 Q3_3.3 Q3_4.3 Q3_5.3 R1.2 R20_1.2 R20_2.2 R20_3.2 R20_4.2 R20_5.2 U5.16 | length 166.7
  Top Layer w0.7: J2.3M@60,87.8 63.4,84.4 71.2,84.4 82.8,72.8 C25.2@82.8,72.3 C27.2@86.9,72.3 U5.16@93.66,72.3 97.36,76 158,76 164.7,82.7 164.7,85.528 ; R20_1.2@139.325,90.168 139.325,87.023 139.4,86.948 145.4,86.948 ; R20_2.2@145.325,90.168 145.325,87.023 145.4,86.948 ; R20_3.2@151.325,90.168 151.325,87.023 151.4,86.948 ; R20_4.2@157.325,90.168 157.325,87.023 157.4,86.948 ; Q3_5.3@162.925,86.948 157.4,86.948 ; R20_5.2@163.325,90.168 163.325,86.948 164.745,85.528 166.985,87.768 166.985,87.818 R1.2@169.225,90.057 ; 145.4,86.948 151.4,86.948 ; 151.4,86.948 157.4,86.948